# EAGLE board Etch (EAGLE 9.6.2)
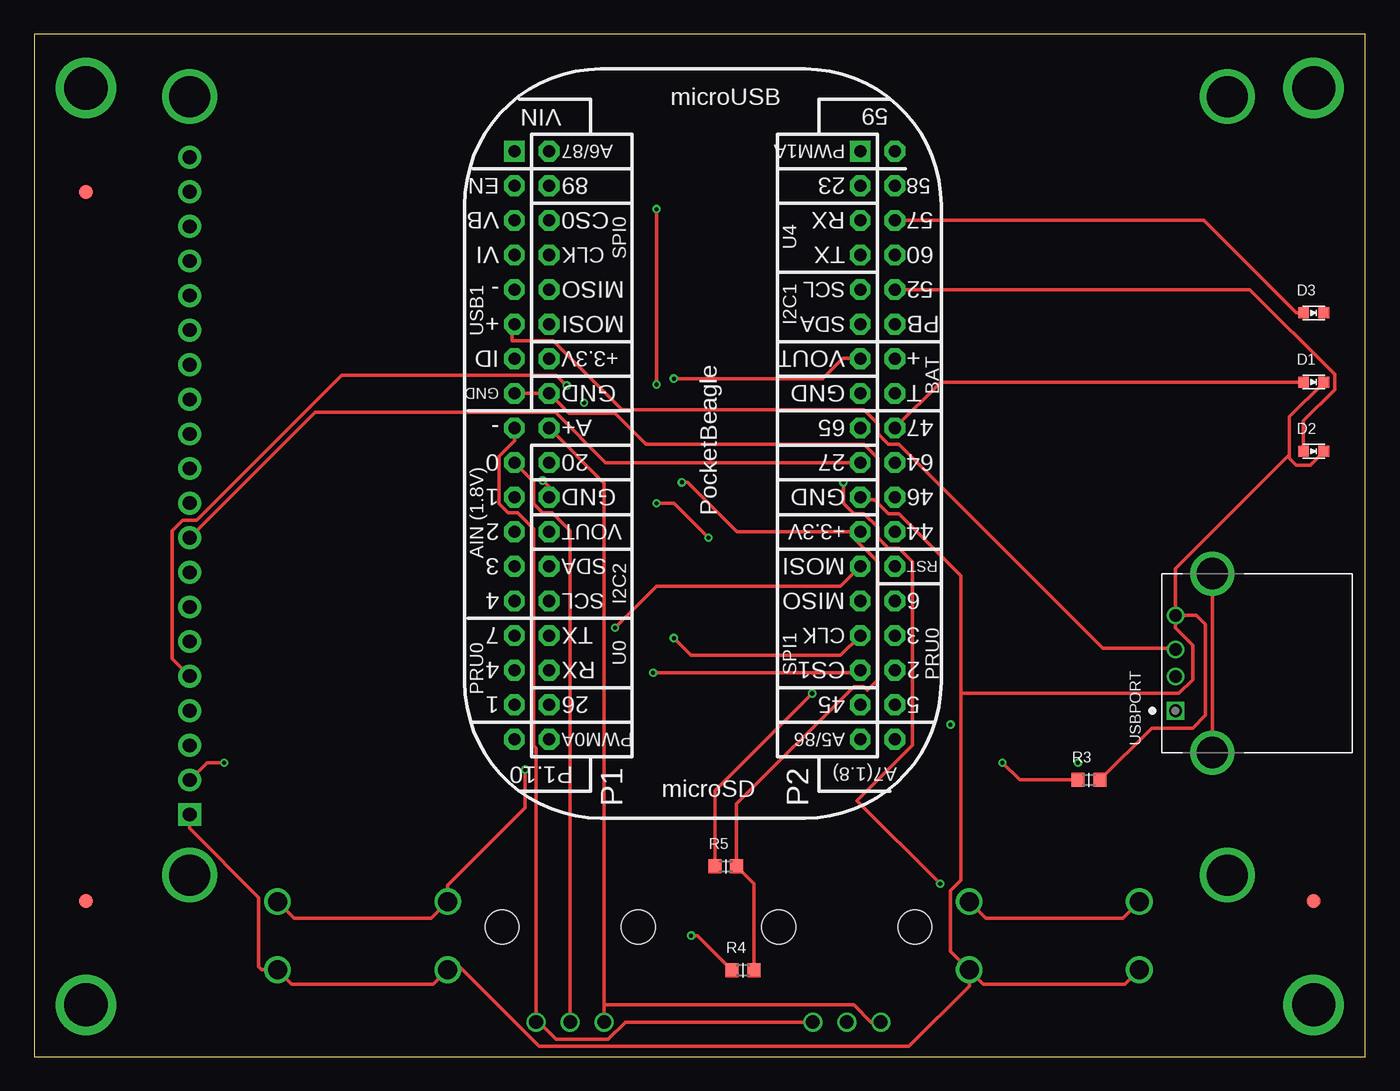
[diagram p0: board, top side]
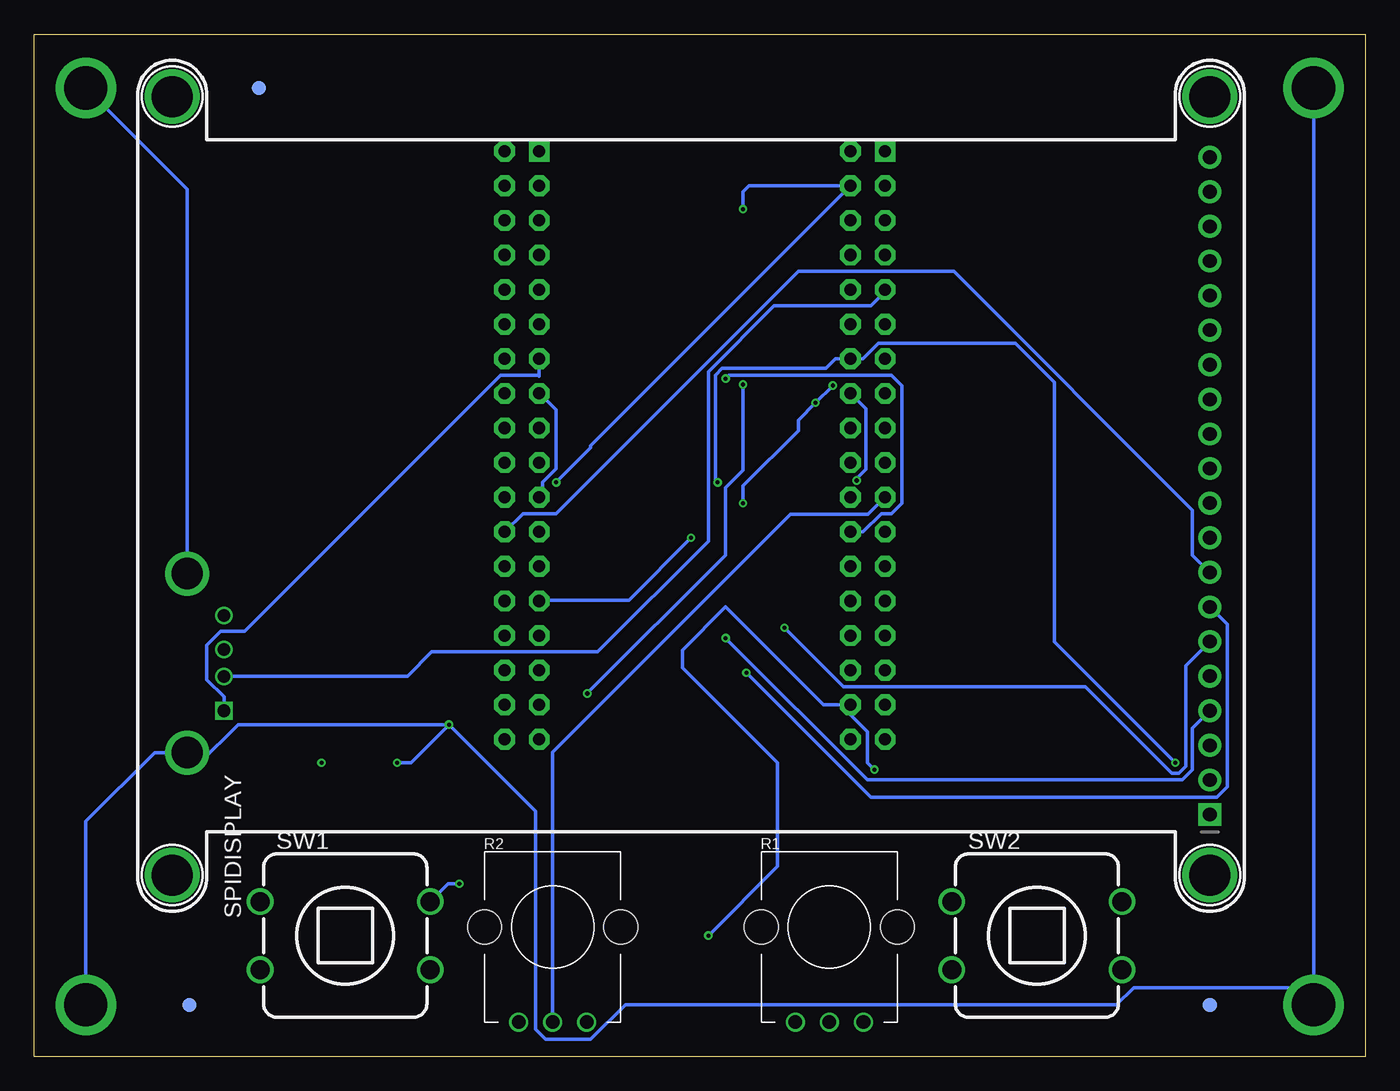
[diagram p1: board, bottom side, seen from below]

Size 97.78 x 75.08 mm. Coordinates in mm from the lower left corner, seen from the top.
Outline: 0,0 97.78,0 97.78,75.08 0,75.08 0,0
Copper layers (1*2*15*16): Top 0.035mm / dielectric 0.23mm / layer 2 0.035mm / dielectric 0.93mm / layer 15 0.035mm / dielectric 0.23mm / Bottom 0.035mm
Design rules "EDES301_4lyr": minimum track width 10mil, minimum drill 12mil, track to track 10mil, track to pad 10mil, pad to pad 10mil, via to via 10mil, smd to smd 10mil, copper to edge 10mil, drill to drill 12mil, minimum pad ring 6mil, minimum via ring 6mil, stop-mask expansion 3mil, vias tented up to drill 25mil, thermal gap 10mil

## Footprints (pad centres in the part's own frame; a part is rotated, then mirrored left to right if it is on the bottom)
EIA-STD = smd 0.8 x 0.8: ANODE -0.75,0; CATHODE 0.75,0
FIDUCIAL_40MIL = smd 1.016 x 1.016: P$1 0,0
MOUNTING_HOLE = drill 3.175 pad 4.445: P$1 0,0
POT-PO90S = drill 1: CCW -2.5,0; CW 2.5,0; S 0,0 | hole 2.5: -5,7; 5,7
R0603 = smd 0.95 x 1.031: 1 -0.8,0; 2 0.8,0
SCREEN = drill 1 pad 1.676: 3VO -19.05,-38.1; 12@JP2 3.81,-38.1; 13@JP2 6.35,-38.1; 14@JP2 8.89,-38.1; 15@JP2 11.43,-38.1; 16@JP2 13.97,-38.1; 17@JP2 16.51,-38.1; 18@JP2 19.05,-38.1; 19@JP2 21.59,-38.1; 20@JP2 24.13,-38.1; CLK -16.51,-38.1; CS -8.89,-38.1; DC -6.35,-38.1; GND@1 1.27,-38.1; LITE -1.27,-38.1; MISO -13.97,-38.1; MOSI -11.43,-38.1; RST -3.81,-38.1; VIN -21.59,-38.1 | drill 1 pad 1.676 square: GND -24.13,-38.1 | drill 3 pad 3.6: P$1@U$7 -28.575,-38.1; P$1@U$15 28.575,-38.1; P$1@U$16 -28.575,38.1; P$1@U$17 28.575,38.1
BUTTON_12.5MM = drill 1.4: 1 -6.25,2.5; 2 -6.25,-2.5; 3 6.25,2.5; 4 6.25,-2.5
POCKETBEAGLE = drill 0.889 pad 1.524 square: P1_01 5.91,3.53; P2_01 5.91,28.93 | drill 0.889 pad 1.524 octagon: P1_02 5.91,6.07; P1_03 8.45,3.53; P1_04 8.45,6.07; P1_05 10.99,3.53; P1_06 10.99,6.07; P1_07 13.53,3.53; P1_08 13.53,6.07; P1_09 16.07,3.53; P1_10 16.07,6.07; P1_11 18.61,3.53; P1_12 18.61,6.07; P1_13 21.15,3.53; P1_14 21.15,6.07; P1_15 23.69,3.53; P1_16 23.69,6.07; P1_17 26.23,3.53; P1_18 26.23,6.07; P1_19 28.77,3.53; P1_20 28.77,6.07; P1_21 31.31,3.53; P1_22 31.31,6.07; P1_23 33.85,3.53; P1_24 33.85,6.07; P1_25 36.39,3.53; P1_26 36.39,6.07; P1_27 38.93,3.53; P1_28 38.93,6.07; P1_29 41.47,3.53; P1_30 41.47,6.07; P1_31 44.01,3.53; P1_32 44.01,6.07; P1_33 46.55,3.53; P1_34 46.55,6.07; P1_35 49.09,3.53; P1_36 49.09,6.07; P2_02 5.91,31.47; P2_03 8.45,28.93; P2_04 8.45,31.47; P2_05 10.99,28.93; P2_06 10.99,31.47; P2_07 13.53,28.93; P2_08 13.53,31.47; P2_09 16.07,28.93; P2_10 16.07,31.47; P2_11 18.61,28.93; P2_12 18.61,31.47; P2_13 21.15,28.93; P2_14 21.15,31.47; P2_15 23.69,28.93; P2_16 23.69,31.47; P2_17 26.23,28.93; P2_18 26.23,31.47; P2_19 28.77,28.93; P2_20 28.77,31.47; P2_21 31.31,28.93; P2_22 31.31,31.47; P2_23 33.85,28.93; P2_24 33.85,31.47; P2_25 36.39,28.93; P2_26 36.39,31.47; P2_27 38.93,28.93; P2_28 38.93,31.47; P2_29 41.47,28.93; P2_30 41.47,31.47; P2_31 44.01,28.93; P2_32 44.01,31.47; P2_33 46.55,28.93; P2_34 46.55,31.47; P2_35 49.09,28.93; P2_36 49.09,31.47
TE_292303-1 = drill 0.92 square: 1 0,0 | drill 0.92: 2 2.5,0; 3 4.5,0; 4 7,0 | drill 2.3: SH1 -3.07,-2.71; SH2 10.07,-2.71

## Placement (x,y rotation side)
D1  BLUE_LED  [EIA-STD]  93.98,49.53 0 top
D2  GREEN_LED  [EIA-STD]  93.98,44.45 0 top
D3  RED_LED  [EIA-STD]  93.98,54.61 0 top
FUD1  FIDUCIAL  [FIDUCIAL_40MIL]  3.81,63.5 0 top
FUD2  FIDUCIAL  [FIDUCIAL_40MIL]  3.81,11.43 0 top
FUD3  FIDUCIAL  [FIDUCIAL_40MIL]  93.98,11.43 0 top
FUD4  FIDUCIAL  [FIDUCIAL_40MIL]  11.43,3.81 0 bottom
FUD5  FIDUCIAL  [FIDUCIAL_40MIL]  81.28,71.12 0 bottom
FUD6  FIDUCIAL  [FIDUCIAL_40MIL]  86.36,3.81 0 bottom
MGT1  MOUNTING_HOLE  [MOUNTING_HOLE]  93.98,71.12 0 top
MGT2  MOUNTING_HOLE  [MOUNTING_HOLE]  3.81,71.12 0 top
MGT3  MOUNTING_HOLE  [MOUNTING_HOLE]  3.81,3.81 0 top
MGT4  MOUNTING_HOLE  [MOUNTING_HOLE]  93.98,3.81 0 top
R1  POTENTIOMETER  [POT-PO90S]  39.37,2.54 0 bottom
R2  POTENTIOMETER  [POT-PO90S]  59.69,2.54 0 bottom
R3  1k  [R0603]  77.47,20.32 0 top
R4  1k  [R0603]  52.07,6.35 0 top
R5  1k  [R0603]  50.8,13.97 0 top
SPIDISPLAY  SCREEN  [SCREEN]  49.53,41.91 90 bottom
SW1  PUSH_BUTTON  [BUTTON_12.5MM]  74.93,8.89 0 bottom
SW2  PUSH_BUTTON  [BUTTON_12.5MM]  24.13,8.89 0 bottom
U1  POCKETBEAGLE  [POCKETBEAGLE]  31.75,72.39 270 top
USBPORT  292303-1  [TE_292303-1]  83.82,25.4 90 top

## Library data of the parts
D1-D3 FUD1-FUD6 MGT1-MGT4 R1-R5 SPIDISPLAY SW1 SW2 U1 = Etch_A_Sketch
USBPORT = Etch_A_Sketch; AVAILABILITY: In Stock; CENTERLINE_PITCH: 2 mm[.078 in]; COMMENT: 292303-1; DESCRIPTION: Conn; Data; USB; Recept; 2.0; 4 Pos; 1 Port; Rt Angle; A Ser; Tin over Copper; EU_ROHS_COMPLIANCE: Compliant; MF: TE Connectivity; MP: 292303-1; NUMBER_OF_POSITIONS: 4; PACKAGE: None; PRICE: None; PRODUCT_TYPE: Connector; PURCHASE-URL: https://pricing.snapeda.com/search/part/292303-1/?ref=eda

## Nets
ANALOG_GND: R1.CW R2.CW U1.P1_17
BAT.VIN: U1.P2_14
BLUE_LED: D1.ANODE U1.P2_18
BUTTON_1: R5.1 SW1.1 SW1.3 U1.P1_04
BUTTON_2: R4.1 SW2.1 SW2.3 U1.P1_34
CGND: MGT1.P$1 MGT2.P$1 MGT3.P$1 MGT4.P$1 R3.1 USBPORT.SH1 USBPORT.SH2
CLK: SPIDISPLAY.CLK U1.P2_29
CS: SPIDISPLAY.CS U1.P2_31
DC: SPIDISPLAY.DC U1.P2_24
DM: U1.P1_09 USBPORT.2
DP: U1.P1_11 USBPORT.3
GND: D1.CATHODE D2.CATHODE R3.2 SPIDISPLAY.GND SW1.2 SW1.4 SW2.2 SW2.4 U1.P1_15 U1.P1_16 U1.P1_22 U1.P2_15 U1.P2_21 USBPORT.4
GREEN_LED: D2.ANODE U1.P2_10
MISO: SPIDISPLAY.MISO U1.P2_27
MOSI: SPIDISPLAY.MOSI U1.P2_25
N$1: D3.CATHODE
POT_1: R1.S U1.P1_19
POT_2: R2.S U1.P1_21
RED_LED: D3.ANODE U1.P2_06
RST: SPIDISPLAY.RST U1.P2_19
VDD_1P8V: R1.CCW R2.CCW U1.P1_18
VDD_3P3V: R4.2 R5.2 SPIDISPLAY.VIN U1.P1_14 U1.P2_23
VDD_5V: U1.P1_24 U1.P2_13 USBPORT.1
VIN: U1.P1_01

## Tracks (layer width: path | path; a pad name or v marks a point on that pad's centre or on a via)
ANALOG_GND
  Top 0.254: U1.P1_17 35.28,45.24 34.14,44.09 34.14,40.61 34.81,39.94 35.5,39.94 36.68,38.76 36.68,22.83 36.87,22.63 R1.CW 37.08,2.54 38.35,1.27 42.16,1.27 43.43,2.54 R2.CW
BLUE_LED
  Top 0.254: D1.ANODE 66.59,49.53 U1.P2_18
BUTTON_1  (via drill 0.3, 0.3 pad 0.61)
  Top 0.254: v66.55,12.7 60.45,18.8 64.52,22.86 64.52,36.32 63.5,37.34 62.74,37.34 61.98,38.1 61.98,38.86 60.96,39.88 60.2,39.88 59.44,40.64 v59.44,42.16 | SW1.1 79.95,10.16 69.91,10.16 SW1.3 | v57.15,26.67 50,19.52 R5.1 | v45.72,62.23 v45.72,49.35
  Bottom 0.254: v66.55,12.7 67.37,12.7 SW1.3 | v59.44,42.16 56.9,44.7 56.9,44.86 U1.P1_04 45.28,63.94 45.72,63.5 v45.72,62.23 | v45.72,49.35 45.72,43.05 46.99,41.78 46.99,36.83 v57.15,26.67
BUTTON_2  (via drill 0.3, 0.3 pad 0.61)
  Top 0.254: v36.07,21.08 36.07,18.29 30.38,12.6 SW2.1 29.15,10.16 19.11,10.16 SW2.3 | v48.26,8.89 48.73,8.89 R4.1
  Bottom 0.254: v36.07,21.08 36.58,21.59 36.58,23.88 38.18,25.48 U1.P1_34 39.81,25.84 46.99,33.02 50.16,29.84 50.16,28.57 43.18,21.59 43.18,13.97 v48.26,8.89
CGND  (via drill 0.3, 0.3 pad 0.61)
  Top 0.254: USBPORT.SH1 USBPORT.SH2 | v71.12,21.59 72.39,20.32 R3.1
  Bottom 0.254: MGT2.P$1 3.81,5.08 | v67.31,24.38 82.8,24.38 85.69,21.49 USBPORT.SH1 88.92,22.33 93.98,17.27 MGT4.P$1 | MGT1.P$1 86.53,63.67 USBPORT.SH2 | 3.81,5.08 17.02,5.08 18.29,3.81 54.36,3.81 56.9,1.27 60.2,1.27 60.96,2.03 60.96,18.03 v67.31,24.38 | 3.81,5.08 MGT3.P$1 | v67.31,24.38 70.1,21.59 v71.12,21.59
  other vias: 76.67,21.59
CLK  (via drill 0.3)
  Top 0.254: v46.99,30.73 48.26,29.46 59.22,29.46 U1.P2_29
  Bottom 0.254: v46.99,30.73 36.58,20.32 13.46,20.32 12.7,21.08 12.7,24.13 SPIDISPLAY.CLK
CS  (via drill 0.3)
  Top 0.254: v45.47,28.19 60.49,28.19 U1.P2_31
  Bottom 0.254: v45.47,28.19 36.32,19.05 10.92,19.05 10.16,19.81 10.16,31.75 SPIDISPLAY.CS
DC
  Bottom 0.254: SPIDISPLAY.DC 12.7,36.83 12.7,40.13 30.23,57.66 41.66,57.66 59.44,39.88 61.88,39.88 U1.P2_24
DM
  Bottom 0.254: U1.P1_09 35.28,56.16 36.32,55.12 43.43,55.12 48.26,50.29 48.26,37.85 56.39,29.72 68.58,29.72 70.36,27.94 83.82,27.94 USBPORT.2
DP
  Top 0.254: U1.P1_11 35.12,53.62 35.12,52.58 38.1,52.58 43.18,47.5 60.96,47.5 61.98,46.48 61.98,45.72 62.74,44.96 63.5,44.96 78.49,29.97 83.82,29.97 USBPORT.3
GND  (via drill 0.3 pad 0.61)
  Top 0.254: SPIDISPLAY.GND 11.43,16.76 16.51,11.68 16.51,6.6 16.72,6.39 SW2.4 18.94,5.33 29.32,5.33 SW2.2 30.92,6.93 37.08,0.76 64.26,0.76 68.68,5.18 SW1.4 | 92.2,44.2 92.2,46.99 94.74,49.53 D1.CATHODE | 92.2,44.2 92.2,43.94 92.71,43.43 93.73,43.43 94.49,44.2 94.49,44.45 D2.CATHODE | USBPORT.4 83.82,35.81 92.2,44.2 | U1.P1_15 U1.P1_16 39.28,47.24 42.67,47.24 44.96,44.96 60.96,44.96 61.98,43.94 61.98,40.64 | 68.07,26.67 68.07,12.95 67.31,12.19 67.31,7.76 SW1.4 | 68.07,26.67 68.07,35.31 63.5,39.88 62.74,39.88 61.98,40.64 | SW1.2 80.12,5.33 69.74,5.33 SW1.4 | 61.98,40.64 61.72,40.89 60.68,40.89 U1.P2_21 | USBPORT.4 83.82,31.5 85.09,30.23 85.09,27.69 84.07,26.67 68.07,26.67 | v37.36,42.3 37.82,41.84 U1.P1_22 | R3.2 82.08,24.13 85.09,24.13 86.02,25.06 86.02,31.75 85.37,32.4 USBPORT.4
  Bottom 0.254: U1.P2_21 60.45,41.08 60.45,42.16 59.44,43.18 59.44,47.5 60.64,48.7 U1.P2_15 | U1.P1_16 36.68,47.56 36.68,43.15 37.36,42.46 v37.36,42.3
GREEN_LED
  Top 0.254: U1.P2_10 89.28,56.32 95.51,50.09 95.51,48.97 93.23,46.69 D2.ANODE
MISO  (via drill 0.3, 0.3 pad 0.61)
  Top 0.254: SPIDISPLAY.MISO 10.16,29.21 10.16,38.61 10.92,39.37 11.94,39.37 22.61,50.04 38.35,50.04 v39.12,49.28 | v49.53,38.1 46.99,40.64 v45.72,40.64
  Bottom 0.254: U1.P2_27 60.61,33.53 54.1,33.53 v49.53,38.1 | v45.72,40.64 45.72,41.91 41.66,45.97 41.66,46.74 v40.39,48.01 v39.12,49.28
MOSI  (via drill 0.3)
  Top 0.254: v42.67,31.5 45.72,34.54 59.22,34.54 U1.P2_25
  Bottom 0.254: v42.67,31.5 38.35,27.18 20.57,27.18 14.22,20.83 13.72,20.83 13.21,21.34 13.21,28.7 SPIDISPLAY.MOSI
POT_1
  Top 0.254: U1.P1_19 36.68,42.22 36.68,40.61 37.35,39.94 38.04,39.94 39.37,38.61 R1.S
POT_2
  Bottom 0.254: R2.S 59.69,22.35 42.23,39.81 36.55,39.81 U1.P1_21
RED_LED
  Top 0.254: D3.ANODE 92.71,54.61 85.92,61.4 U1.P2_06
RST
  Top 0.254: U1.P2_19 41.98,43.62 38.29,47.3 20.63,47.3 SPIDISPLAY.RST
VDD_1P8V
  Top 0.254: R1.CCW 41.87,3.81 | 41.87,3.81 41.87,42.11 U1.P1_18 | R2.CCW 61.47,2.54 60.2,3.81 41.87,3.81
VDD_3P3V  (via drill 0.3 pad 0.61)
  Top 0.254: SPIDISPLAY.VIN 12.7,21.59 v13.97,21.59 | R4.2 52.87,12.7 R5.2 51.6,18.58 60.2,27.18 60.96,27.18 61.21,26.92 61.98,27.69 61.98,36.32 60.22,38.08 U1.P2_23 51.63,38.54 48.01,42.16 v47.57,42.16
  Bottom 0.254: v13.97,21.59 22.86,30.48 22.86,49.53 25.71,52.38 35.75,52.38 36.9,51.24 U1.P1_14 38.93,51.24 39.62,50.55 47.24,50.55 47.75,50.04 47.75,42.16 v47.57,42.16
VDD_5V  (via drill 0.3)
  Top 0.254: v46.99,49.78 57.91,49.78 59.41,51.28 60.64,51.28 U1.P2_13
  Bottom 0.254: USBPORT.1 83.82,26.42 85.09,27.69 85.09,30.23 84.07,31.24 82.3,31.24 63.5,50.04 60.75,50.04 60.68,49.97 U1.P2_13 | v46.99,49.78 46.74,50.04 34.8,50.04 34.04,49.28 34.04,40.64 34.8,39.88 35.56,39.88 36.9,38.54 U1.P1_24